# EAGLE board MAPLE-CUN-V017-routed (EAGLE 7.3.0)
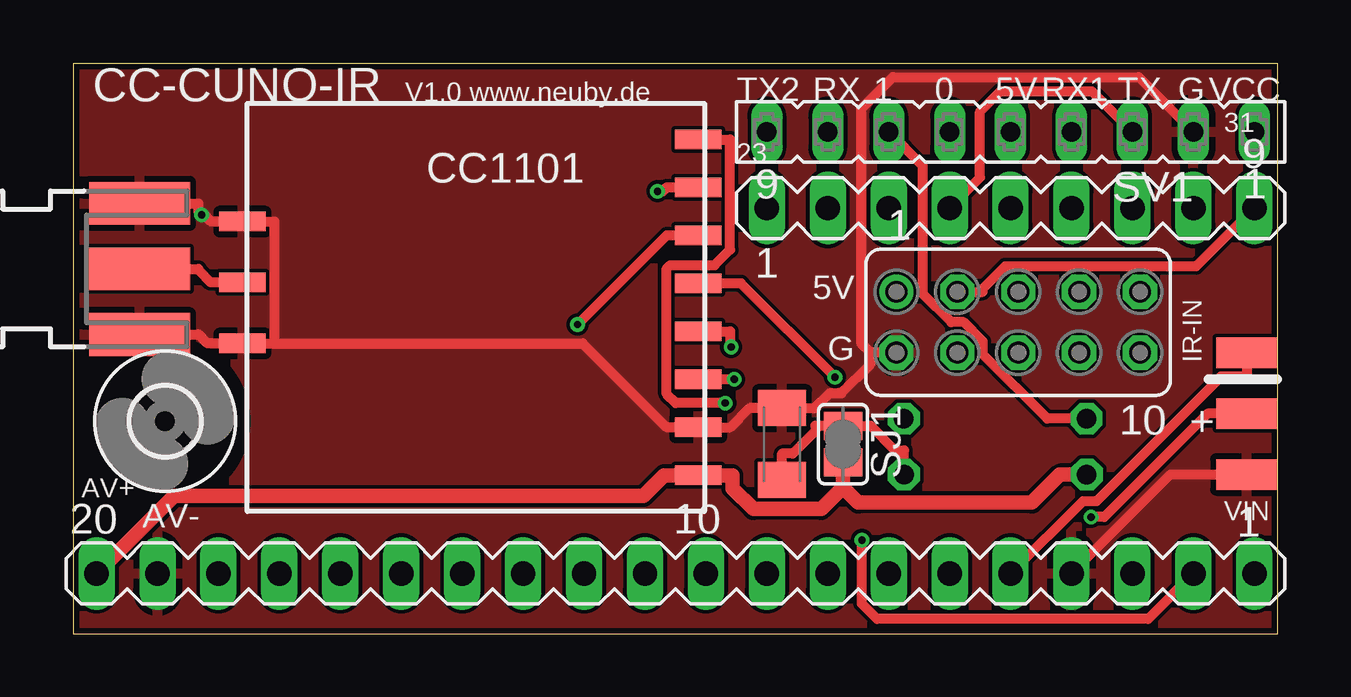
[diagram p0: board, top side]
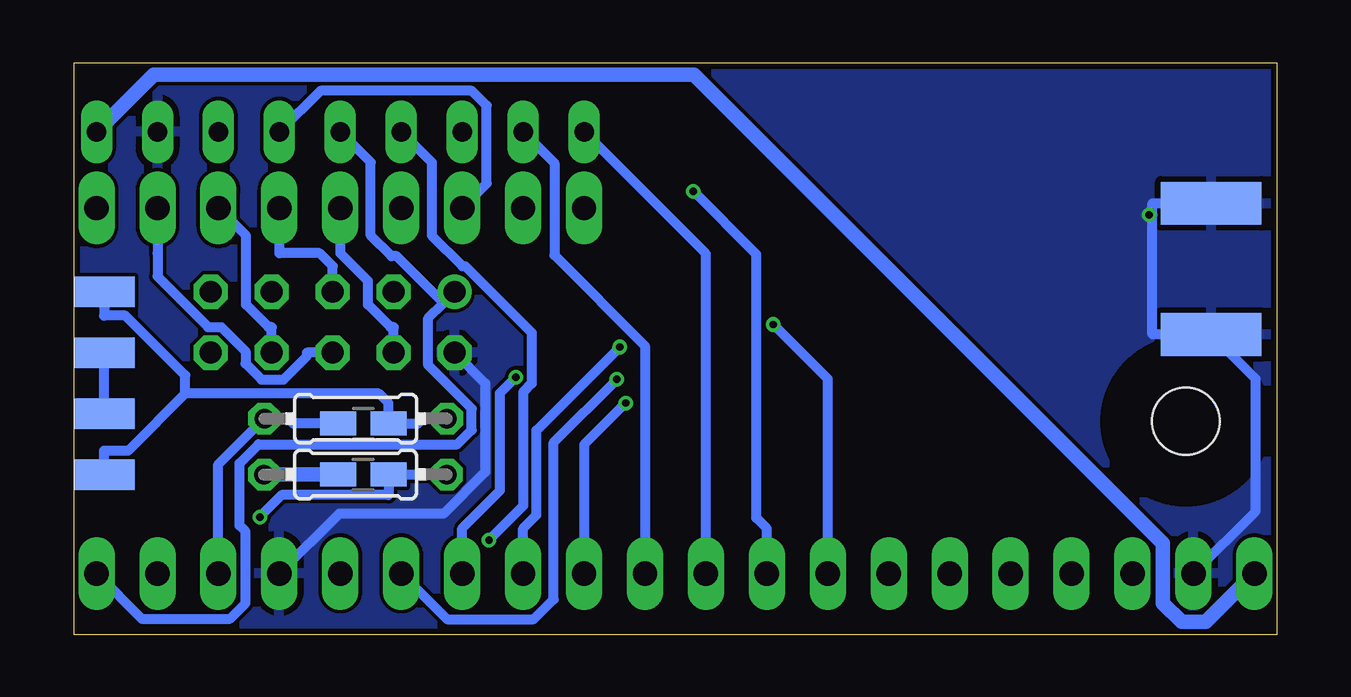
[diagram p1: board, bottom side, seen from below]

Size 50.16 x 23.81 mm. Coordinates in mm from the lower left corner, seen from the top.
Outline: 0,0 0,23.81 50.16,23.81 50.16,0 0,0
Copper layers (1*16): Top 0.035mm / dielectric 1.5mm / Bottom 0.035mm
Design rules "Fusion_eagle_rule_v1.1": minimum track width 6mil, minimum drill 12mil, track to track 6mil, track to pad 6mil, pad to pad 6mil, via to via 6mil, smd to smd 0mil, copper to edge 10mil, drill to drill 10mil, minimum pad ring 10mil, minimum via ring 6mil, stop-mask expansion 2mil, vias tented up to drill 100mil, thermal gap 10mil
Net classes: 0 default: width 0.406 mm; 1 PWR: width 0.61 mm

## Footprints (pad centres in the part's own frame; a part is rotated, then mirrored left to right if it is on the bottom)
C1206K = smd 1.5 x 2: 1 -1.5,0; 2 1.5,0
CC1101_MODULE1_SMD = smd 1.93 x 0.813: ANT 19,5.96; CSN 0,0; GDO0 0,2; GDO2 0,4; GND@0 0,12; GND@1 19,8.5; GND@2 19,3.42; MISO 0,6; MOSI 0,10; SCLK 0,8; VCC 0,14
SMD1,27-2,54 = smd 1.27 x 2.54: 1 0,0
2,8 = hole 2.8: 0,0
0204/7 = drill 0.813 octagon: 1 -3.81,0; 2 3.81,0
R0805W = smd 1.5 x 1: 1 -1.052,0; 2 1.052,0
SJ = smd 1.168 x 1.6: 1 -0.762,0; 2 0.762,0
FE09 = drill 0.813 long: 1 -10.16,0; 2 -7.62,0; 3 -5.08,0; 4 -2.54,0; 5 0,0; 6 2.54,0; 7 5.08,0; 8 7.62,0; 9 10.16,0
MA20-1 = drill 1.016 long: 1 -24.13,0; 2 -21.59,0; 3 -19.05,0; 4 -16.51,0; 5 -13.97,0; 6 -11.43,0; 7 -8.89,0; 8 -6.35,0; 9 -3.81,0; 10 -1.27,0; 11 1.27,0; 12 3.81,0; 13 6.35,0; 14 8.89,0; 15 11.43,0; 16 13.97,0; 17 16.51,0; 18 19.05,0; 19 21.59,0; 20 24.13,0
MA09-1 = drill 1.016 long: 1 -10.16,0; 2 -7.62,0; 3 -5.08,0; 4 -2.54,0; 5 0,0; 6 2.54,0; 7 5.08,0; 8 7.62,0; 9 10.16,0
FE05-2 = drill 0.914: 1 -5.08,1.27 | drill 0.914 octagon: 2 -5.08,-1.27; 3 -2.54,1.27; 4 -2.54,-1.27; 5 0,1.27; 6 0,-1.27; 7 2.54,1.27; 8 2.54,-1.27; 9 5.08,1.27; 10 5.08,-1.27
SMA = smd 4.191 x 1.778: 1 2.115,0; GND@1 2.115,2.733; GND@2 2.115,-2.733 | smd 4.191 x 1.778 bottom: GND@3 2.115,2.733; GND@4 2.115,-2.733

## Placement (x,y rotation side)
C2  4,7uF  [C1206K]  29.53,7.94 90 top
CC1101  CC1101_MODULE1SMD  [CC1101_MODULE1_SMD]  26.04,20.64 180 top
GND  [SMD1,27-2,54]  48.9,6.67 90 top
H1  MOUNT-HOLE2.8  [2,8]  3.81,8.89 0 top
IR+  [SMD1,27-2,54]  48.9,9.21 90 top
IR-IN  [SMD1,27-2,54]  48.9,11.75 90 top
PC+  [SMD1,27-2,54]  48.9,14.29 90 bottom
PC-  [SMD1,27-2,54]  48.9,11.75 90 bottom
PWR+  [SMD1,27-2,54]  48.9,6.67 90 bottom
PWR-  [SMD1,27-2,54]  48.9,9.21 90 bottom
R2  100  [0204/7]  38.42,6.67 180 bottom
R3  100  [R0805W]  38.1,6.67 180 bottom
R5  220  [0204/7]  38.41,9 0 bottom
R7  220  [R0805W]  38.09,8.79 0 bottom
SJ1  [SJ]  32.07,7.94 270 top
SV1  [FE09]  39.05,20.95 180 top
SV4  [MA20-1]  25.08,2.54 180 top
SV5  [MA09-1]  39.05,17.78 0 top
W5100  [FE05-2]  39.37,13.02 0 top
X1  SMA  [SMA]  0.64,15.24 0 top

## Library data of the parts
C2 R2 R3 R5 R7 = rcl
CC1101 = wireless
GND IR+ IR-IN PC+ PC- PWR+ PWR- = wirepad
H1 = holes
SJ1 = jumper
SV1 W5100 = con-lsta; OC_FARNELL: unknown; OC_NEWARK: unknown
SV4 SV5 = con-lstb; OC_FARNELL: unknown; OC_NEWARK: unknown
X1 = sma

## Nets
0-PB11: SV1.6 SV4.2
1-PB10: R5.1 R7.1 SV1.7 SV4.3
3-PB0: IR-IN.1 SV4.5
12: SV4.15
13: SV4.16
14: SV4.17
+5V: SV1.5 SV4.1 W5100.1
CC_IN_0: CC1101.GDO2 SV4.13
CC_OUT_0: CC1101.GDO0 SV4.12
CSN: CC1101.CSN SV4.9
GND: C2.2 CC1101.GND@0 CC1101.GND@1 CC1101.GND@2 GND.1 SV1.2 SV4.4 SV4.19 W5100.2 X1.GND@1 X1.GND@2 X1.GND@3 X1.GND@4
IR+: C2.1 IR+.1 R2.1 R3.1 SJ1.1
MISO2: SV5.7 W5100.8
MOSI: CC1101.MOSI SV4.6
MOSI2: SV5.6 W5100.5
N$1: CC1101.ANT X1.1
N$3: CC1101.MISO SV4.7
N$4: CC1101.SCLK SV4.8
PWR+: PC+.1 PWR+.1 R5.2 R7.2
PWR-: PC-.1 PWR-.1
RX1: SV1.4 SV5.3
S2RX: SV1.8 SV4.10
S2TX: SV1.9 SV4.11
SCK2: SV5.8 W5100.6
TX1: SV1.3 SV5.4
USB-DM: SV5.1
USB-DP: SV5.2
VCC [PWR]: CC1101.VCC R2.2 R3.2 SJ1.2 SV1.1 SV4.20
WIZ_CS: SV5.9 W5100.3
WIZ_RST: SV5.5 W5100.4

## Tracks (layer width: path | path; a pad name or v marks a point on that pad's centre or on a via)
0-PB11  (via drill 0.3 pad 0.61)
  Top 0.406: SV4.2 44.78,0.65 33.48,0.65 32.85,1.28 v32.85,3.94
  Bottom 0.406: SV1.6 35.24,19.68 35.24,16.64 33.96,15.35 33.84,15.35 31.07,12.58 31.07,10.46 31.43,10.1 31.43,5.36 v32.85,3.94
1-PB10
  Top 0.406: R5.1 40.58,9 37.9,11.68 37.9,12.22 37.1,13.02 36.58,13.02 35.4,14.2 35.4,19.53 SV1.7
  Bottom 0.406: R7.1 41,8.79 41.21,9 R5.1 44.13,7.09 SV4.3
3-PB0
  Top 0.406: SV4.5 42.07,5.55 42.63,5.55 47.83,10.76 48.9,10.76 IR-IN.1
+5V
  Bottom 0.406: SV4.1 47.33,0.66 43.65,0.66 43,1.3 43,4.29 43.25,4.54 43.25,7.14 42.46,7.92 34.18,7.92 33.58,8.52 33.58,9.41 35.39,11.23 35.39,13.19 34.75,13.82 | W5100.1 34.75,13.82 | 34.75,13.82 36.7,15.78 36.92,15.78 37.78,16.64 37.78,19.68 SV1.5
CC_IN_0  (via drill 0.3 pad 0.61)
  Top 0.406: v21,12.93 24.71,16.64 CC1101.GDO2
  Bottom 0.406: SV4.13 18.73,10.66 v21,12.93
CC_OUT_0  (via drill 0.3 pad 0.61)
  Top 0.406: CC1101.GDO0 24.71,18.64 24.55,18.48 v24.34,18.48
  Bottom 0.406: SV4.12 21.27,4.42 21.71,4.86 21.71,15.85 v24.34,18.48
CSN  (via drill 0.3 pad 0.61)
  Top 0.406: CC1101.CSN 27.36,20.64 27.36,16.05 26.71,15.4 24.86,15.4 24.71,15.25 24.71,10.03 25.1,9.65 v27.16,9.65
  Bottom 0.406: v27.16,9.65 28.89,7.92 SV4.9
GND  (via drill 0.3 pad 0.61)
  Top 0.406: SV4.4 45.72,6.67 GND.1 | 33.22,11.75 32.83,12.14 32.83,21.92 34.15,23.24 44.39,23.24 SV1.2 | 33.22,11.75 33.22,11.29 32.01,10.07 31.52,10.07 30.88,9.44 C2.2 28.17,9.44 27.37,8.64 CC1101.GND@0 24.71,8.64 21.21,12.14 8.36,12.14 | 33.22,11.75 | W5100.2 33.22,11.75 | X1.GND@1 5.2,17.97 5.2,17.63 v5.34,17.5 5.43,17.5 5.71,17.22 CC1101.GND@2 8.36,17.22 8.36,12.14 | 8.36,12.14 7.7,12.14 CC1101.GND@1 5.57,12.14 5.2,12.51 X1.GND@2
  Bottom 0.406: W5100.2 33.01,10.47 33.01,6.77 34.75,5.03 39.1,5.03 SV4.4 | 5.2,17.5 5.2,17.97 X1.GND@1 | 5.2,17.5 5.2,12.51 X1.GND@2 0.9,10.66 0.9,5.13 SV4.19 | 5.2,17.5 v5.34,17.5
  pour Top: 0,24.13 0,0 50.16,0 50.16,24.13
  pour Bottom: 0,0 0,24.13 50.16,24.13 50.16,0
IR+  (via drill 0.3 pad 0.61)
  Top 0.406: v42.41,4.89 42.96,4.89 47.27,9.21 IR+.1 | C2.1 29.53,7.54 29.98,7.54 30.91,8.48 30.91,8.7 SJ1.1 32.65,8.7 33.22,8.7 34.24,7.68 34.61,7.68 R2.1
  Bottom 0.406: v42.41,4.89 41.49,5.81 37.05,5.81 R3.1 36.49,6.67 35.94,6.67 R2.1
MISO2
  Bottom 0.406: W5100.8 41.91,12.81 42.04,12.81 42.98,13.75 42.98,16.62 SV5.7
MOSI  (via drill 0.3 pad 0.61)
  Top 0.406: v27.53,10.64 CC1101.MOSI
  Bottom 0.406: SV4.6 34.61,0.64 30.99,0.64 30.16,1.46 30.16,8 v27.53,10.64
MOSI2
  Bottom 0.406: SV5.6 41.59,15.9 39.92,15.9 39.37,15.35 W5100.5
N$1
  Top 0.406: X1.1 5.2,15.24 5.2,15.19 5.71,14.68 CC1101.ANT
N$3  (via drill 0.3 pad 0.61)
  Top 0.406: v31.73,10.73 27.82,14.64 CC1101.MISO
  Bottom 0.406: SV4.7 33.97,4.42 32.39,6 32.39,10.07 v31.73,10.73
N$4  (via drill 0.3 pad 0.61)
  Top 0.406: v27.4,11.98 27.36,12.03 27.36,12.64 CC1101.SCLK
  Bottom 0.406: SV4.8 31.43,4.42 30.87,4.98 30.87,8.51 v27.4,11.98
PWR+
  Bottom 0.406: 45.52,10.04 37.44,10.04 37.04,9.65 R7.2 35.83,8.79 35.62,9 R5.2 | PC+.1 48.9,13.3 48.01,13.3 45.52,10.8 45.52,10.04 | 45.52,10.04 47.9,7.66 48.9,7.66 PWR+.1
PWR-
  Bottom 0.406: PWR-.1 PC-.1
RX1
  Bottom 0.406: SV5.3 32.95,18.8 32.95,22.05 33.57,22.67 39.88,22.67 SV1.4
S2RX
  Bottom 0.406: SV1.8 30.13,19.65 30.13,15.81 26.35,12.03 SV4.10
S2TX
  Bottom 0.406: SV4.11 23.81,15.88 SV1.9
SCK2
  Bottom 0.406: SV5.8 46.67,15.9 46.67,14.93 44.56,12.81 44.01,12.81 43,11.8 43,11.29 42.34,10.63 41.42,10.63 40.44,11.61 40.44,11.75 W5100.6
TX1
  Top 0.406: SV5.4 37.78,19.05 37.78,21.81 38.62,22.64 42.44,22.64 SV1.3
VCC
  Top 0.61: 32.07,6.13 32.7,5.5 39.95,5.5 41.11,6.67 R2.2 | 32.07,6.13 31.16,5.23 28.33,5.23 27.46,6.1 27.46,6.64 CC1101.VCC 24.61,6.64 23.75,5.77 4.19,5.77 SV4.20 | SJ1.2 32.07,6.13
  Bottom 0.61: R2.2 R3.2 | SV4.20 2.97,0.52 3.98,0.52 4.76,1.3 4.76,3.8 24.31,23.34 46.82,23.34 SV1.1
WIZ_CS
  Top 0.406: W5100.3 37.9,14.29 37.9,14.42 38.83,15.35 46.79,15.35 SV5.9
WIZ_RST
  Bottom 0.406: SV5.5 39.05,15.9 37.9,14.74 37.9,13.75 36.96,12.81 36.83,12.81 W5100.4

## Text on the board
tNames: CC-CUNO-IR | V1.0 www.neuby.de | TX2 | RX | 1 | 0 | 5V | RX1 | TX | G | VCC | 31 | 23 | 5V | IR-IN | G | + | AV+ | VIN | AV-
bValues: PC | SW | -